# EAGLE board Electronic Design OpenBook Hardware v1 (EAGLE 9.7.0)
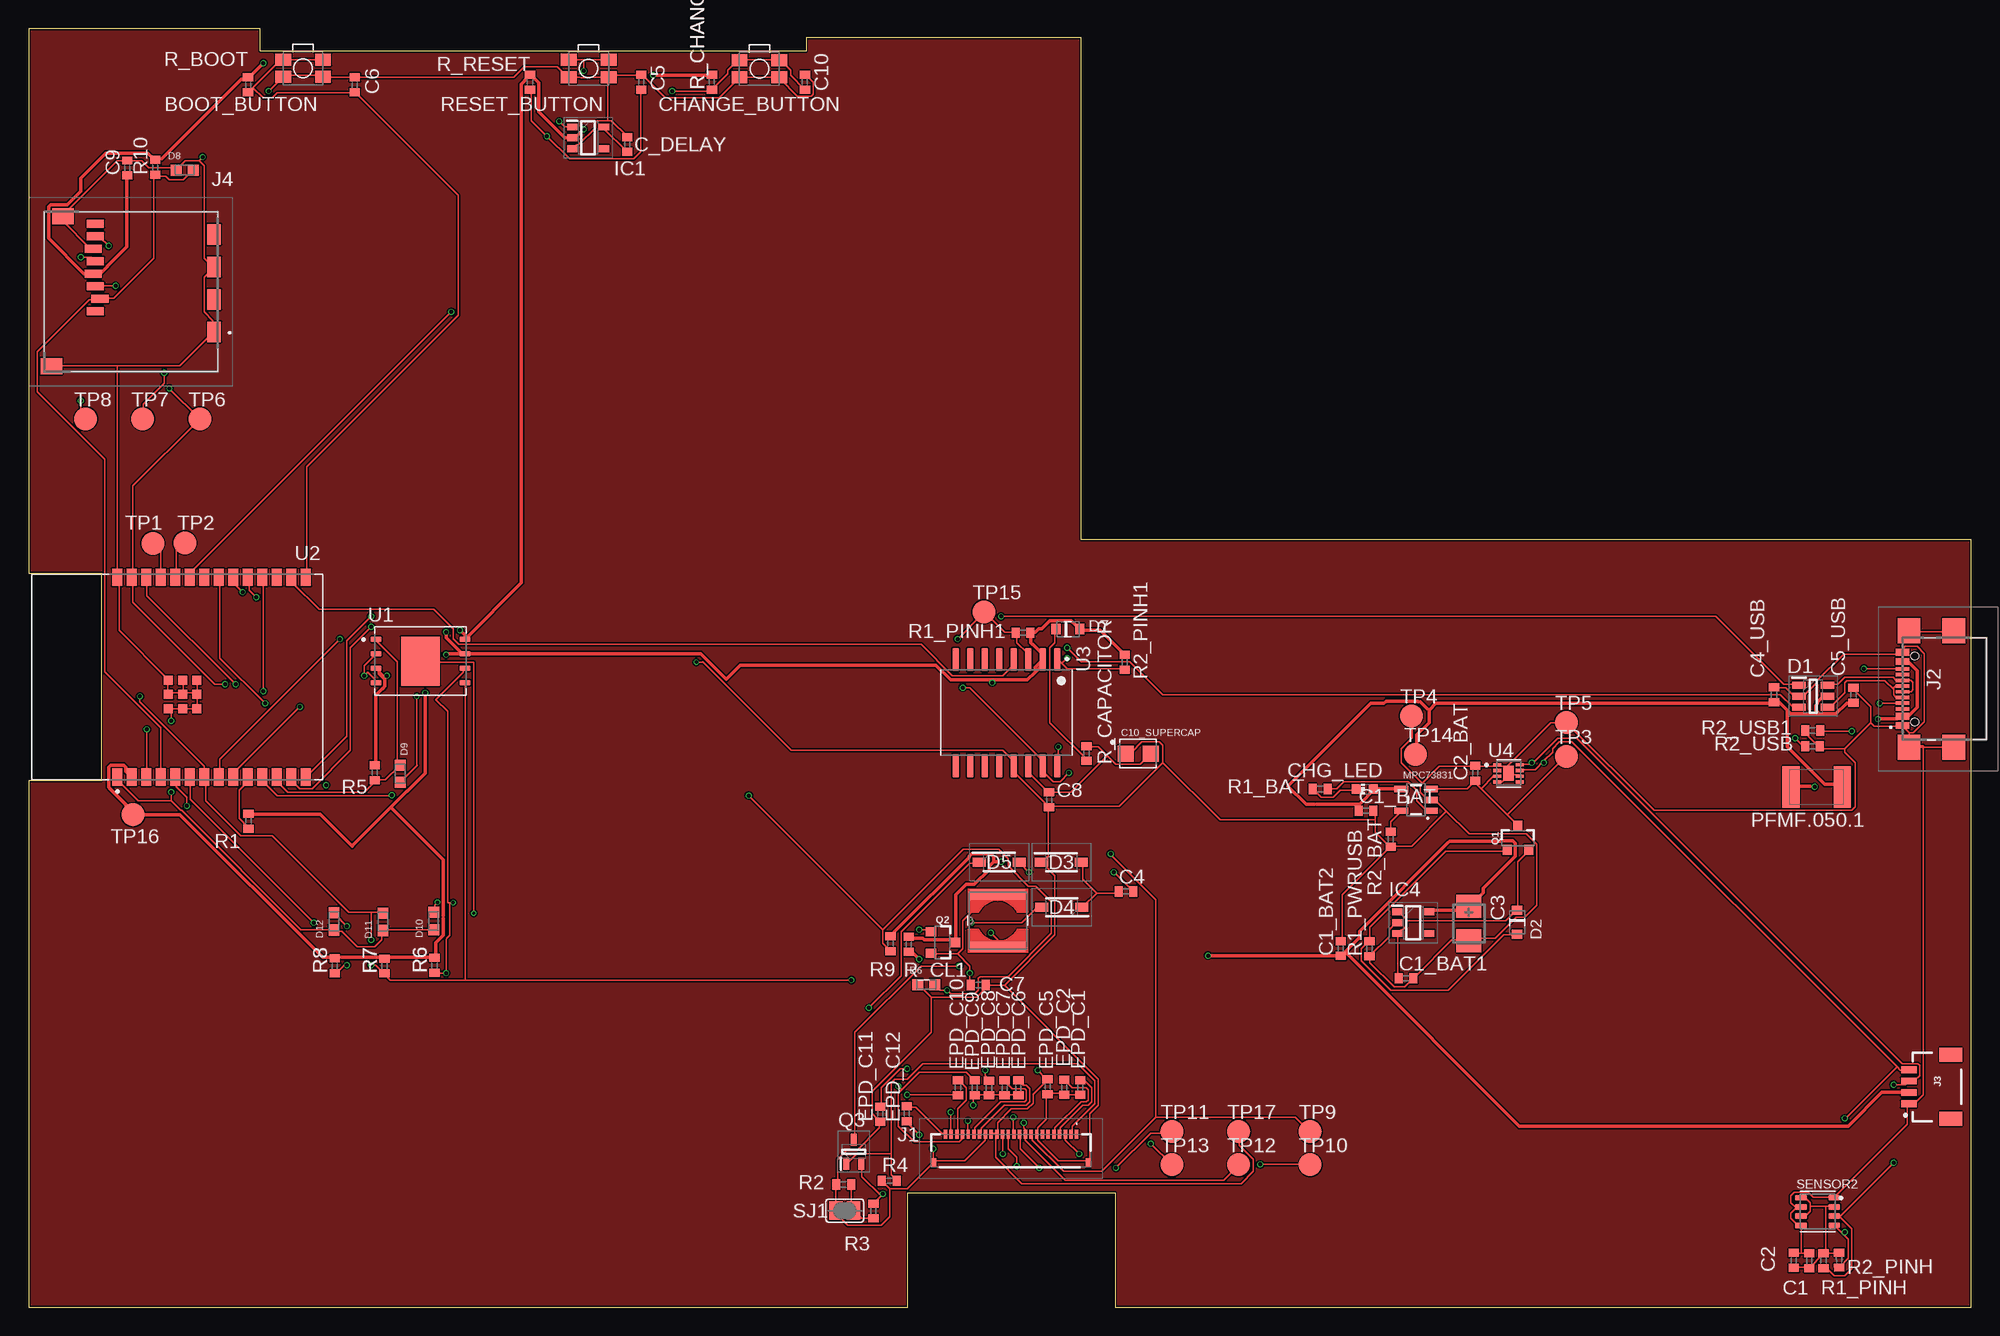
[diagram p0: board, top side]
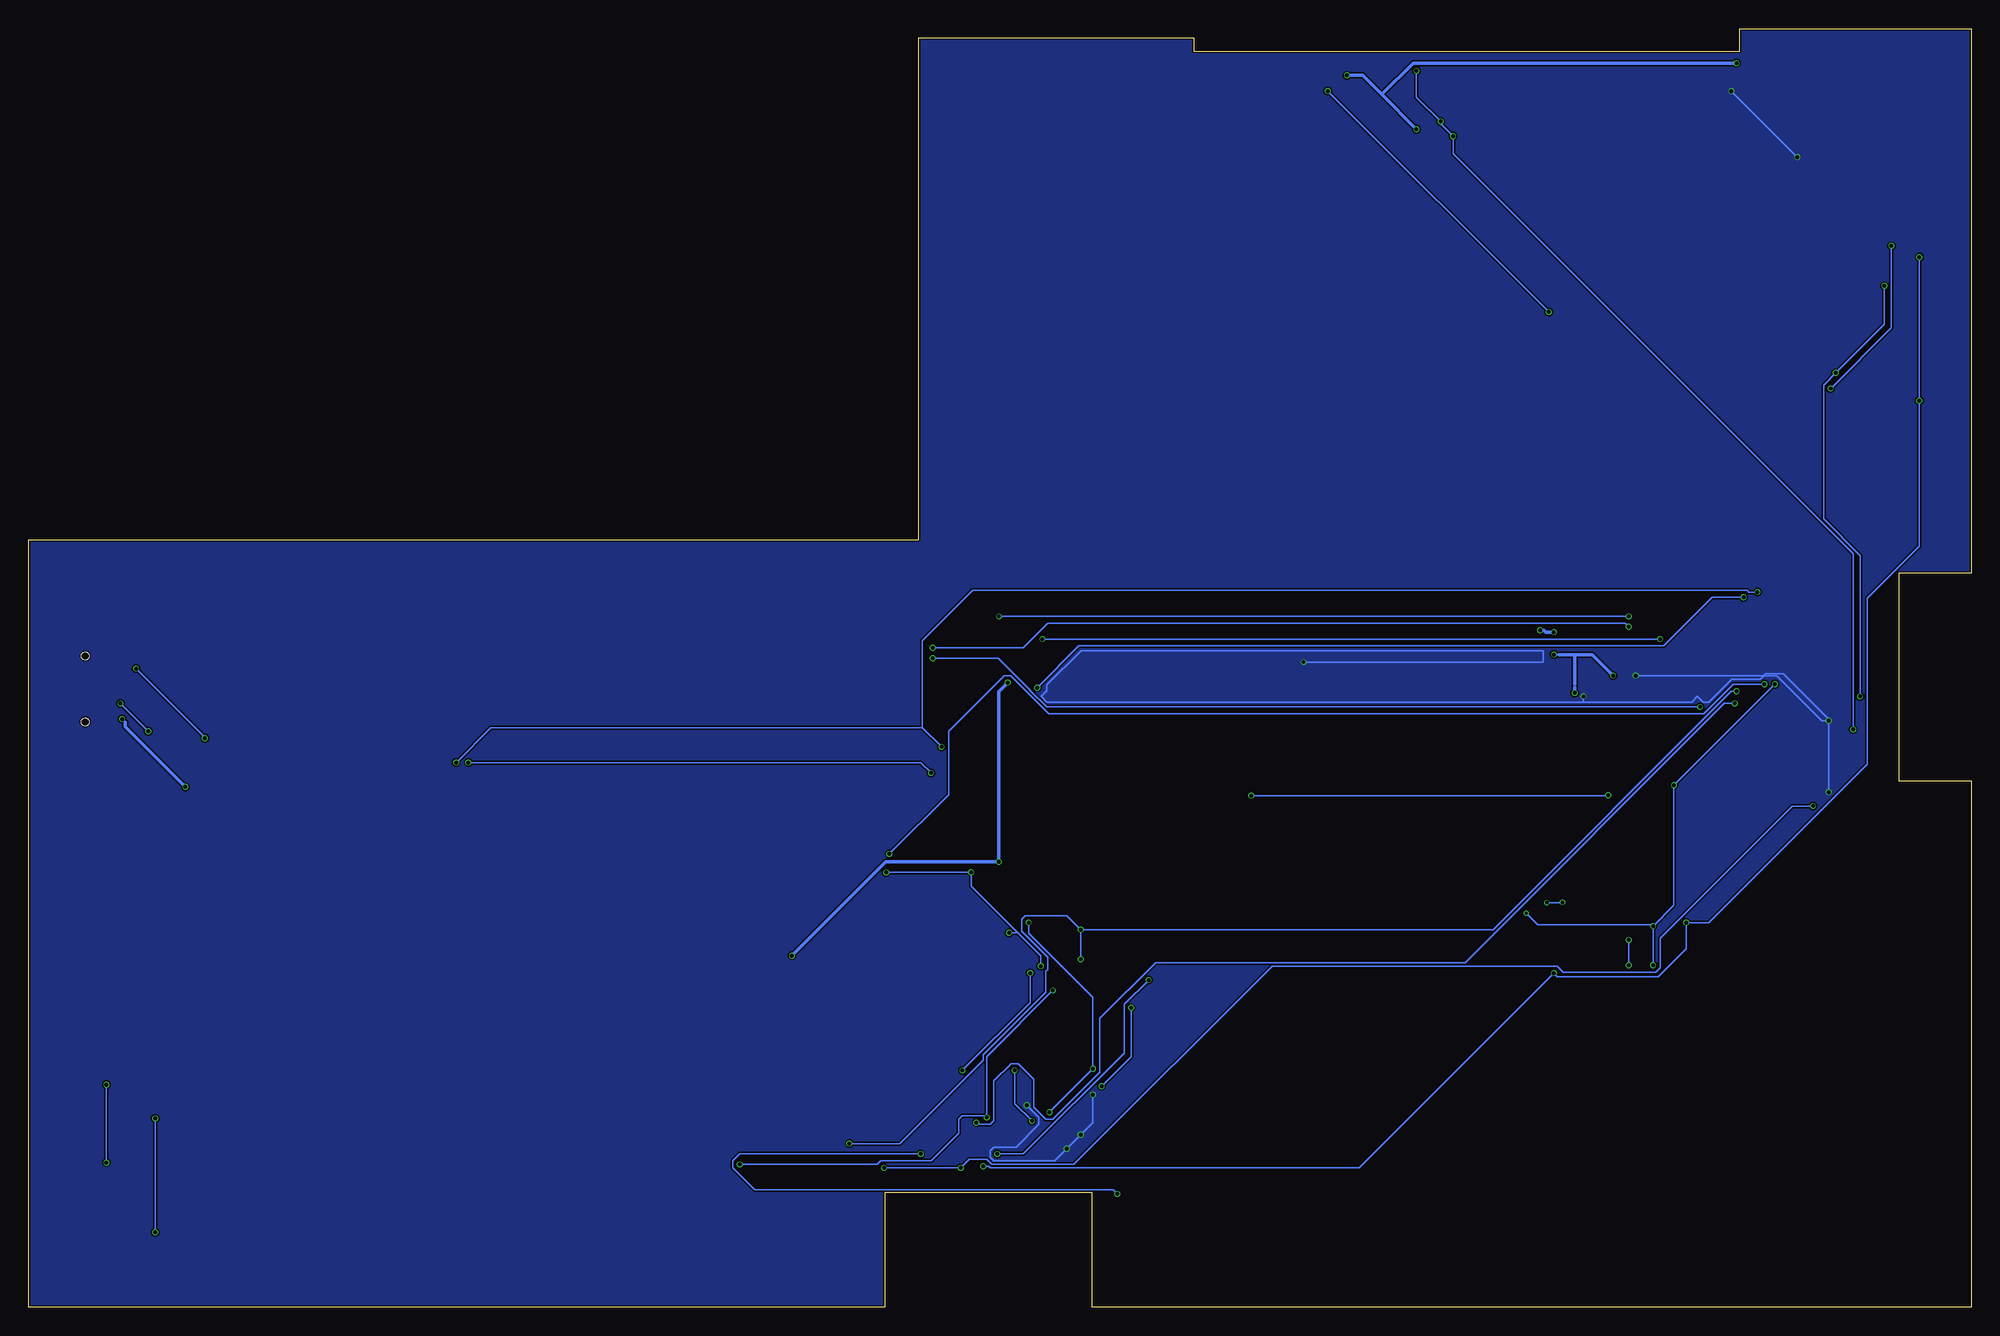
[diagram p1: board, bottom side, seen from below]

Size 170.2 x 112 mm. Coordinates in mm from the lower left corner, seen from the top.
Outline: 0,0 77,0 77,10 95.2,10 95.2,0 170.2,0 170.2,67.2 92.2,67.2 92.2,111.2 68.14,111.2 68.14,110.03 20.28,110.03 20.28,112 0,112 0,64.3 6.39,64.3 6.39,46.1 0,46.1 0,0
Copper layers (1*16): Top 0.035mm / dielectric 1.6mm / Bottom 0.035mm
Design rules "jlcpcb-2layers.dru": minimum track width 0.15mm, minimum drill 0.3mm, track to track 5mil, track to pad 5mil, pad to pad 5mil, via to via 5mil, smd to smd 5mil, copper to edge 0.15mm, drill to drill 6mil, minimum pad ring 10mil, minimum via ring 3mil, stop-mask expansion 4mil, vias tented up to drill 0mil, thermal gap 10mil

## Footprints (pad centres in the part's own frame; a part is rotated, then mirrored left to right if it is on the bottom)
MYBUTTON = smd 1.4 x 1.05: 1 1.75,0.75; 2 -1.75,0.75; 3 -1.75,-0.75; 4 1.75,-0.75
EAGLE-LTSPICE_C0402 = smd 0.7 x 0.9: 1 -0.65,0; 2 0.65,0
ESP32_WROVER_EAGLE-LTSPICE_C0402 = smd 0.7 x 0.9: 1 -0.65,0; 2 0.65,0
RCL_CT3528 = smd 2 x 2.2: + -1.5,0; - 1.5,0
CAPCP3225X100N = smd 1.4 x 1.4: 1 -1.1,0; 2 1.1,0
ADAFRUIT_CHIP-LED0603 = smd 0.8 x 0.8: A 0,-0.75; C 0,0.75
SOT95P280X145-6N = smd 1.2 x 0.6: 1 -1.25,0.95; 2 -1.25,0; 3 -1.25,-0.95; 4 1.25,-0.95; 5 1.25,0; 6 1.25,0.95
ESP32_WROVER_AVX---SD0805S020S1R0_AVX_SD0805S020S1R0_0 = smd 0.8 x 0.9: 1 -1.05,0; 2 1.05,0
SOD3716X135N = smd 1.15 x 0.8: 1 -1.75,0; 2 1.75,0
DIOC1608X36N = smd 0.97 x 0.94: 1 -0.75,0; 2 0.75,0
SOT95P280X120-5N = smd 0.9 x 0.6: 1 -1.4,0.95; 2 -1.4,0; 3 -1.4,-0.95; 4 1.4,-0.95; 5 1.4,0.95
FH34SRJ24S05SH99 = smd 0.3 x 0.8: 1 5.75,1.45; 2 5.25,1.45; 3 4.75,1.45; 4 4.25,1.45; 5 3.75,1.45; 6 3.25,1.45; 7 2.75,1.45; 8 2.25,1.45; 9 1.75,1.45; 10 1.25,1.45; 11 0.75,1.45; 12 0.25,1.45; 13 -0.25,1.45; 14 -0.75,1.45; 15 -1.25,1.45; 16 -1.75,1.45; 17 -2.25,1.45; 18 -2.75,1.45; 19 -3.25,1.45; 20 -3.75,1.45; 21 -4.25,1.45; 22 -4.75,1.45; 23 -5.25,1.45; 24 -5.75,1.45 | smd 0.4 x 0.8: MP1 6.75,-1.05; MP2 -6.75,-1.05
SAMACSYS_PARTS_USB4110GFA = smd 0.3 x 1.15: A1 -3.35,3.678; A4 -2.55,3.678; A5 -1.25,3.678; A6 -0.25,3.678; A7 0.25,3.678; A8 1.25,3.678; A9 2.55,3.678; A12 3.35,3.678; B1 3.05,3.678; B4 2.25,3.678; B5 1.75,3.678; B6 0.75,3.678; B7 -0.75,3.678; B8 -1.75,3.678; B9 -2.25,3.678; B12 -3.05,3.678 | smd 2.18 x 2: MP1 -5.11,-0.827; MP2 5.11,-0.827; MP3 -5.11,3.103; MP4 5.11,3.103 | hole 0.65: -2.89,2.603; 2.89,2.603
JST04_1MM_RA = smd 0.6 x 1.35: 1 -1.5,0; 2 -0.5,0; 3 0.5,0; 4 1.5,0 | smd 1.2 x 2: NC1 2.8,-3.675; NC2 -2.8,-3.675
112ATAARR03ATTEND = smd 1.8 x 1.2: G1 10.6,10.4; G2 4.9,10.4; S1 7.75,10.4; S2 2.05,10.4 | smd 1.4 x 1.9: G3 13.6,-3.85; G4 0.45,-2.85 | smd 0.7 x 1.5: P1 8.8,0; P2 7.7,0.4; P3 6.6,0; P4 5.5,-0.2; P5 4.4,0; P6 3.3,-0.2; P7 2.2,0; P8 1.1,0
IND_4828-WE-TPC_WRE = smd 0.889 x 4.826: 1 -2.286,0; 2 2.286,0
ESP32_WROVER_SPARKFUN-IC-POWER_SOT23-5 = smd 0.55 x 1.2: 1 -0.95,-1.3; 2 0,-1.3; 3 0.95,-1.3; 4 0.95,1.3; 5 -0.95,1.3
ESP32C6_VARISTOR_CT/CN1812 = smd 1.5 x 3.6: 1 -2.25,0; 2 2.25,0
ESP32_WROVER_SPARKFUN-DISCRETESEMI_SOT23-3 = smd 0.8 x 0.9: 1 -0.95,-1; 2 0.95,-1; 3 0,1.1
SOT65P210X110-3N = smd 1.05 x 0.5: 1 -1.05,0.65; 2 -1.05,-0.65; 3 1.05,0
ESP32_WROVER_EAGLE-LTSPICE_R0402 = smd 0.7 x 0.9: 1 -0.65,0; 2 0.65,0
ESP32_WROVER_BME680_PSON80P300X300X100-8N = smd 1.016 x 0.5: 1 1.458,1.2; 2 1.458,0.4; 3 1.458,-0.4; 4 1.458,-1.2; 5 -1.458,-1.22; 6 -1.458,-0.4; 7 -1.458,0.4; 8 -1.458,1.2
SJ = smd 1.168 x 1.6: 1 -0.762,0; 2 0.762,0
TP20R = smd 2 x 2: TP 0,0
SON127P600X800X80-9N = smd 0.94 x 0.44: 1 -3.895,1.905; 2 -3.895,0.635; 3 -3.895,-0.635; 4 -3.895,-1.905; 5 3.895,-1.905; 6 3.895,-0.635; 7 3.895,0.635; 8 3.895,1.905 | smd 3.4 x 4.3: 9 0,0
XCVR_ESP32-C6-WROOM-1-N8 = smd 1.5 x 0.9: 1 -8.75,5.26; 2 -8.75,3.99; 3 -8.75,2.72; 4 -8.75,1.45; 5 -8.75,0.18; 6 -8.75,-1.09; 7 -8.75,-2.36; 8 -8.75,-3.63; 9 -8.75,-4.9; 10 -8.75,-6.17; 11 -8.75,-7.44; 12 -8.75,-8.71; 13 -8.75,-9.98; 14 -8.75,-11.25; 15 8.75,-11.25; 16 8.75,-9.98; 17 8.75,-8.71; 18 8.75,-7.44; 19 8.75,-6.17; 20 8.75,-4.9; 21 8.75,-3.63; 22 8.75,-2.36; 23 8.75,-1.09; 24 8.75,0.18; 25 8.75,1.45; 26 8.75,2.72; 27 8.75,3.99; 28 8.75,5.26 | smd 0.8 x 0.8: 29_1 -2.755,0.79; 29_2 -1.505,0.79; 29_3 -0.255,0.79; 29_4 -2.755,-0.46; 29_5 -1.505,-0.46; 29_6 -0.255,-0.46; 29_7 -2.755,-1.71; 29_8 -1.505,-1.71; 29_9 -0.255,-1.71
SOIC127P1032X265-16N = smd 2.05 x 0.59: 1 -4.655,4.445; 2 -4.655,3.175; 3 -4.655,1.905; 4 -4.655,0.635; 5 -4.655,-0.635; 6 -4.655,-1.905; 7 -4.655,-3.175; 8 -4.655,-4.445; 9 4.655,-4.445; 10 4.655,-3.175; 11 4.655,-1.905; 12 4.655,-0.635; 13 4.655,0.635; 14 4.655,1.905; 15 4.655,3.175; 16 4.655,4.445
SON50P200X200X80-9N = smd 0.76 x 0.27: 1 -0.985,0.75; 2 -0.985,0.25; 3 -0.985,-0.25; 4 -0.985,-0.75; 5 0.985,-0.75; 6 0.985,-0.25; 7 0.985,0.25; 8 0.985,0.75 | smd 0.9 x 1.3: 9 0,0

## Placement (x,y rotation side)
BOOT_BUTTON  BUTTON_CUSYOMV1MYBUTTONV1  [MYBUTTON]  24.04,108.53 180 top
C1  100nF  [EAGLE-LTSPICE_C0402]  155.99,4.06 90 top
C1_BAT  4.7uF  [ESP32_WROVER_EAGLE-LTSPICE_C0402]  117.16,43.47 0 top
C1_BAT1  4.7uF  [ESP32_WROVER_EAGLE-LTSPICE_C0402]  120.67,28.81 0 top
C1_BAT2  4.7uF  [ESP32_WROVER_EAGLE-LTSPICE_C0402]  114.94,31.41 90 top
C2  100nF  [EAGLE-LTSPICE_C0402]  154.63,4.09 90 top
C2_BAT  4.7uF  [ESP32_WROVER_EAGLE-LTSPICE_C0402]  126.73,46.77 90 top
C3  100uF TANT  [RCL_CT3528]  126.17,33.6 270 top
C4  4.7uF/25V  [ESP32_WROVER_EAGLE-LTSPICE_C0402]  96.14,36.41 0 top
C4_USB  100nF  [ESP32_WROVER_EAGLE-LTSPICE_C0402]  152.9,53.64 90 top
C5  1uF  [EAGLE-LTSPICE_C0402]  53.68,107.3 90 top
C5_USB  4.7uF  [ESP32_WROVER_EAGLE-LTSPICE_C0402]  159.87,53.61 90 top
C6  100nF  [EAGLE-LTSPICE_C0402]  28.57,107.07 90 top
C7  10uF  [ESP32_WROVER_EAGLE-LTSPICE_C0402]  83.2,28.21 0 top
C8  100nF  [EAGLE-LTSPICE_C0402]  89.4,44.43 270 top
C9  100nF  [ESP32_WROVER_EAGLE-LTSPICE_C0402]  8.65,99.79 90 top
C10  100nF  [EAGLE-LTSPICE_C0402]  68.01,107.3 90 top
C10_SUPERCAP  CPH3225ACAPCP322V1  [CAPCP3225X100N]  97.2,48.48 0 top
C_DELAY  100nF  [EAGLE-LTSPICE_C0402]  52.44,101.84 90 top
CHANGE_BUTTON  BUTTON_CUSYOMV1MYBUTTONV1  [MYBUTTON]  64.03,108.47 180 top
CHG_LED  [ADAFRUIT_CHIP-LED0603]  117.06,45.38 90 top
D1  USBLC6-2SC6YSOT95P2801X1V2  [SOT95P280X145-6N]  156.33,53.51 0 top
D2  ESP32_WROVER_AVX---SD0805S020S1R0_AVX_SD0805S020S1R0_0_0  [ESP32_WROVER_AVX---SD0805S020S1R0_AVX_SD0805S020S1R0_0]  130.4,33.72 270 top
D3  MBR0530SOD3716XV1  [SOD3716X135N]  90.48,38.96 0 top
D4  MBR0530SOD3716XV1  [SOD3716X135N]  90.51,35.03 180 top
D5  MBR0530SOD3716XV1  [SOD3716X135N]  85.03,38.98 0 top
D6  PGB1010603MRDIOC1608XV1  [DIOC1608X36N]  78.64,28.24 0 top
D7  ESP32_WROVER_AVX---SD0805S020S1R0_AVX_SD0805S020S1R0_0_0  [ESP32_WROVER_AVX---SD0805S020S1R0_AVX_SD0805S020S1R0_0]  91.05,59.39 0 top
D8  PGB1010603MRDIOC1608XV1  [DIOC1608X36N]  13.68,99.59 0 top
D9  PGB1010603MRDIOC1608XV1  [DIOC1608X36N]  32.56,46.72 90 top
D10  PGB1010603MRDIOC1608XV1  [DIOC1608X36N]  35.49,33.82 90 top
D11  PGB1010603MRDIOC1608XV1  [DIOC1608X36N]  31.04,33.74 90 top
D12  PGB1010603MRDIOC1608XV1  [DIOC1608X36N]  26.75,33.78 90 top
EPD_C1  1uF/50V  [EAGLE-LTSPICE_C0402]  92.12,19.24 90 top
EPD_C2  1uF/50V  [EAGLE-LTSPICE_C0402]  90.72,19.25 90 top
EPD_C5  0.1uF/50V  [EAGLE-LTSPICE_C0402]  89.27,19.31 90 top
EPD_C6  1uF/50V  [EAGLE-LTSPICE_C0402]  86.71,19.2 90 top
EPD_C7  1uF/50V  [EAGLE-LTSPICE_C0402]  85.5,19.2 90 top
EPD_C8  1uF/50V  [EAGLE-LTSPICE_C0402]  84.14,19.19 90 top
EPD_C9  1uF/50V  [EAGLE-LTSPICE_C0402]  82.88,19.21 90 top
EPD_C10  1uF/50V  [EAGLE-LTSPICE_C0402]  81.42,19.22 90 top
EPD_C11  1uF/50V  [EAGLE-LTSPICE_C0402]  74.61,16.9 90 top
EPD_C12  1uF/50V  [EAGLE-LTSPICE_C0402]  76.93,16.95 90 top
IC1  BD5229G-TR  [SOT95P280X120-5N]  49.02,102.43 0 top
IC4  XC6220A331MR-GSOT95P285V1  [SOT95P280X120-5N]  121.3,33.67 0 top
J1  FH34SRJ-24S-0.5SH_99_FH34V1  [FH34SRJ24S05SH99]  86.07,13.7 0 top
J2  SAMACSYS_PARTS_USB4110-GF-ASAMACSYSV1  [SAMACSYS_PARTS_USB4110GFA]  167.83,54.15 90 top
J3  QWIIC_RIGHT_ANGLE  [JST04_1MM_RA]  164.72,19.3 90 top
J4  112A-TAAR-R03_ATTEND1123ATAARV1  [112ATAARR03ATTEND]  5.86,96.02 270 top
L1  744043680IND_4828-WE-TPC_WRE  [IND_4828-WE-TPC_WRE]  84.92,33.85 90 top
MPC73831  ESP32_WROVER_SPARKFUN-IC-POWER_MCP73831ESP32_WROOMMCP673811  [ESP32_WROVER_SPARKFUN-IC-POWER_SOT23-5]  121.55,44.43 90 top
PFMF.050.1  ESP32C6_VARISTOR  [ESP32C6_VARISTOR_CT/CN1812]  156.64,45.56 0 top
Q1  20V/4.2A/52mΩ/1.4W  [ESP32_WROVER_SPARKFUN-DISCRETESEMI_SOT23-3]  130.47,41.06 0 top
Q2  20V/4.2A/52mΩ/1.4W  [ESP32_WROVER_SPARKFUN-DISCRETESEMI_SOT23-3]  80.05,31.94 270 top
Q3  SI1308EDL-T1-GE3SOT65P21V1  [SOT65P210X110-3N]  72.29,13.62 90 top
R1  10K  [ESP32_WROVER_EAGLE-LTSPICE_R0402]  19.27,42.57 90 top
R1_BAT  200  [ESP32_WROVER_EAGLE-LTSPICE_R0402]  113.14,45.38 0 top
R1_PINH  10K  [ESP32_WROVER_EAGLE-LTSPICE_R0402]  157.24,4.07 90 top
R1_PINH1  10K  [ESP32_WROVER_EAGLE-LTSPICE_R0402]  87.12,59.08 0 top
R1_PWRUSB  100K  [ESP32_WROVER_EAGLE-LTSPICE_R0402]  117.47,31.39 90 top
R2  2.2  [ESP32_WROVER_EAGLE-LTSPICE_R0402]  71.4,10.74 0 top
R2_BAT  2K  [ESP32_WROVER_EAGLE-LTSPICE_R0402]  119.32,40.98 90 top
R2_PINH  10K  [ESP32_WROVER_EAGLE-LTSPICE_R0402]  158.6,4.12 90.5 top
R2_PINH1  10K  [ESP32_WROVER_EAGLE-LTSPICE_R0402]  96.02,56.49 90 top
R2_USB  5k1  [ESP32_WROVER_EAGLE-LTSPICE_R0402]  156.28,49.12 0 top
R2_USB1  5k1  [ESP32_WROVER_EAGLE-LTSPICE_R0402]  156.29,50.51 0 top
R3  0.47  [ESP32_WROVER_EAGLE-LTSPICE_R0402]  74.01,8.42 90 top
R4  10K  [ESP32_WROVER_EAGLE-LTSPICE_R0402]  75.41,11.07 0 top
R5  10K  [ESP32_WROVER_EAGLE-LTSPICE_R0402]  30.33,46.82 90 top
R6  10K  [ESP32_WROVER_EAGLE-LTSPICE_R0402]  35.56,29.93 90 top
R7  10K  [ESP32_WROVER_EAGLE-LTSPICE_R0402]  31.18,29.88 90 top
R8  10K  [ESP32_WROVER_EAGLE-LTSPICE_R0402]  26.83,29.89 90 top
R9  10K  [ESP32_WROVER_EAGLE-LTSPICE_R0402]  75.51,31.84 90 top
R10  10K  [ESP32_WROVER_EAGLE-LTSPICE_R0402]  11.09,99.84 90 top
R_BOOT  10K  [ESP32_WROVER_EAGLE-LTSPICE_R0402]  19.23,107.07 90 top
R_CAPACITOR  15  [ESP32_WROVER_EAGLE-LTSPICE_R0402]  92.68,48.49 90 top
R_CHANGE  10K  [ESP32_WROVER_EAGLE-LTSPICE_R0402]  59.86,107.3 90 top
R_CL1  10K  [ESP32_WROVER_EAGLE-LTSPICE_R0402]  77.11,31.77 90 top
R_RESET  10K  [ESP32_WROVER_EAGLE-LTSPICE_R0402]  43.93,107.3 90 top
RESET_BUTTON  BUTTON_CUSYOMV1MYBUTTONV1  [MYBUTTON]  49.06,108.5 180 top
SENSOR2  ESP32_WROVER_BME680_BME680ESP32_WROOM_BME680V1  [ESP32_WROVER_BME680_PSON80P300X300X100-8N]  156.72,8.37 0 top
SJ1  [SJ]  71.5,8.45 0 top
TP1  TPTP20R  [TP20R]  10.9,66.9 0 top
TP2  TPTP20R  [TP20R]  13.69,66.94 0 top
TP3  TPTP20R  [TP20R]  134.71,48.24 0 top
TP4  TPTP20R  [TP20R]  121.14,51.79 0 top
TP5  TPTP20R  [TP20R]  134.71,51.22 0 top
TP6  TPTP20R  [TP20R]  15,77.8 0 top
TP7  TPTP20R  [TP20R]  10,77.8 0 top
TP8  TPTP20R  [TP20R]  5,77.8 0 top
TP9  TPTP20R  [TP20R]  112.27,15.38 0 top
TP10  TPTP20R  [TP20R]  112.26,12.47 0 top
TP11  TPTP20R  [TP20R]  100.16,15.38 0 top
TP12  TPTP20R  [TP20R]  106,12.47 0 top
TP13  TPTP20R  [TP20R]  100.16,12.47 0 top
TP14  TPTP20R  [TP20R]  121.49,48.41 0 top
TP15  TPTP20R  [TP20R]  83.69,60.9 0 top
TP16  TPTP20R  [TP20R]  9.15,43.14 0 top
TP17  TPTP20R  [TP20R]  106,15.38 0 top
U1  W25Q512JVEIQSON127P6V1  [SON127P600X800X80-9N]  34.34,56.59 0 top
U2  ESP32-C6-WROOM-1-N8XCVR_ESPV1  [XCVR_ESP32-C6-WROOM-1-N8]  13.04,55.18 90 top
U3  DS3231SN#SOIC127P1V1  [SOIC127P1032X265-16N]  85.67,52.07 270 top
U4  MAX17048G+T10SON50P20V1  [SON50P200X200X80-9N]  129.65,46.75 0 top

## Library data of the parts
BOOT_BUTTON C1_BAT C1_BAT1 C1_BAT2 C2_BAT C3 C4 C4_USB C5_USB C7 C9 C10_SUPERCAP CHANGE_BUTTON CHG_LED D1-D12 IC1 IC4 J1-J4 L1 MPC73831 PFMF.050.1 Q1-Q3 R1 R1_BAT R1_PINH R1_PINH1 R1_PWRUSB R2 R2_BAT R2_PINH R2_PINH1 R2_USB R2_USB1 R3-R10 R_BOOT R_CAPACITOR R_CHANGE R_CL1 R_RESET RESET_BUTTON SENSOR2 SJ1 TP1-TP17 U1-U4 = DeskAssistant v19 v1
C1 C2 C5 C6 C8 C10 C_DELAY EPD_C1 EPD_C2 EPD_C5-EPD_C12 = DeskAssistant v19 v1; SPICEMODEL: NONE; SPICEPREFIX: C

## Nets
3V3: C1_BAT2.1 C3.+ C9.1 D7.2 IC1.2 IC4.5 J3.2 J4.P4 Q2.3 R1.2 R1_PINH1.2 R2_PINH1.2 R5.2 R6.2 R7.2 R8.2 R9.2 R10.2 R_BOOT.2 R_CHANGE.2 R_CL1.2 R_RESET.2 TP16.TP U1.3 U1.7 U1.8 U2.2 U3.2
12C_PW: C1.1 C2.1 R1_PINH.2 R2_PINH.2 SENSOR2.2 SENSOR2.6 SENSOR2.8
32KHZ: R2_PINH1.1 U2.9 U3.1
DN: D1.4 J2.A7 J2.B7
DP: D1.6 J2.A6 J2.B6
EPD_3V3: C7.1 EPD_C5.2 J1.15 J1.16 L1.2 Q2.2 TP17.TP
EPD_3V3_C: Q2.1 R_CL1.1 TP13.TP U2.18
EPD_BUSY: J1.9 TP9.TP U2.26
EPD_CS: D6.2 J1.12 R9.1 TP10.TP U2.11
EPD_DC: J1.11 TP11.TP U2.5
EPD_RST: J1.10 TP12.TP U2.21
FLASH_CS: D9.2 R5.1 U1.1 U2.12
GDR: J1.2 Q3.1 R4.2
GND: BOOT_BUTTON.1 BOOT_BUTTON.2 C1.2 C1_BAT1.2 C1_BAT2.2 C1_BAT.2 C2.2 C2_BAT.2 C3.- C4_USB.2 C5.2 C5_USB.2 C6.2 C7.2 C8.2 C9.2 C10.2 C10_SUPERCAP.1 C_DELAY.2 CHANGE_BUTTON.1 CHANGE_BUTTON.2 D1.2 D3.1 D6.1 D8.1 D9.1 D10.1 D11.1 D12.1 EPD_C1.1 EPD_C2.1 EPD_C5.1 EPD_C6.1 EPD_C7.1 EPD_C8.1 EPD_C9.1 EPD_C10.1 EPD_C11.1 EPD_C12.1 IC1.3 IC4.2 J1.8 J1.17 J1.MP1 J1.MP2 J2.A1 J2.A12 J2.B1 J2.B12 J2.MP1 J2.MP2 J2.MP3 J2.MP4 J3.1 J4.G1 J4.G2 J4.G3 J4.G4 J4.P6 MPC73831.2 R1_PWRUSB.1 R2.1 R2_BAT.1 R2_USB1.1 R2_USB.2 R4.1 RESET_BUTTON.1 RESET_BUTTON.2 SENSOR2.1 SENSOR2.5 SENSOR2.7 SJ1.1 TP4.TP TP5.TP U1.2 U1.4 U2.1 U2.28 U2.29_1 U2.29_2 U2.29_3 U2.29_4 U2.29_5 U2.29_6 U2.29_7 U2.29_8 U2.29_9 U3.13 U4.1 U4.4 U4.6 U4.9
GPIO8: R1.1 U2.10
I2C_PW: U2.17
INT_RTC: R1_PINH1.1 TP15.TP U2.8 U3.3
IO/BOOT: BOOT_BUTTON.3 BOOT_BUTTON.4 C6.1 R_BOOT.1 U2.15
IO/CHANGE: C10.1 CHANGE_BUTTON.3 CHANGE_BUTTON.4 R_CHANGE.1 U2.23
MISO: D12.2 J4.P7 R8.1 TP6.TP U1.9 U2.27
MOSI: D11.2 J1.14 J4.P3 R7.1 TP7.TP U1.5 U2.7
N$1: J2.A5 R2_USB1.2
N$2: C4.1 D3.2 D4.1
N$3: C_DELAY.1 IC1.5
N$4: CHG_LED.C R1_BAT.1
N$5: MPC73831.1 R1_BAT.2
N$7: J2.B5 R2_USB.1
N$8: MPC73831.5 R2_BAT.2
N$14: EPD_C2.2 J1.5
N$24: EPD_C1.2 J1.4
N$25: EPD_C12.2 J1.24
N$27: EPD_C10.2 J1.22
N$29: EPD_C8.2 J1.20
N$30: EPD_C7.2 J1.19
N$31: EPD_C6.2 J1.18
N$39: D7.1 R_CAPACITOR.1
N$42: D2.2 Q1.1 R1_PWRUSB.2
N$43: C1_BAT1.1 D2.1 IC4.1 IC4.3 Q1.2
PREVGH: D5.1 EPD_C9.2 J1.21
PREVGL: D4.2 EPD_C11.2 J1.23
RESE: J1.3 Q3.2 R3.2
RESE': R2.2 R3.1 SJ1.2
RESET: C5.1 IC1.1 R_RESET.1 RESET_BUTTON.3 RESET_BUTTON.4 U2.3
RTC_RST: U2.16 U3.4
RX: TP2.TP U2.24
SCK: D10.2 J1.13 J4.P5 R6.1 TP8.TP U1.6 U2.6
SCL: J3.4 R2_PINH.1 SENSOR2.4 U2.20 U3.16 U4.7
SDA: J3.3 R1_PINH.1 SENSOR2.3 U2.19 U3.15 U4.8
SRC: C4.2 D5.2 L1.1 Q3.3
SS_SD: D8.2 J4.P2 R10.1 U2.4
TX: TP1.TP U2.25
USB_D+: D1.1 U2.14
USB_D-: D1.3 U2.13
VBAT: C2_BAT.1 MPC73831.3 Q1.3 TP3.TP U4.2 U4.3
VBUS: C1_BAT.1 C4_USB.1 C5_USB.1 CHG_LED.A D1.5 MPC73831.4 PFMF.050.1.2 TP14.TP
VRTC: C8.1 C10_SUPERCAP.2 R_CAPACITOR.2 U3.14
VUSB: J2.A4 J2.A9 J2.B4 J2.B9 PFMF.050.1.1

## Tracks (layer width: path | path; a pad name or v marks a point on that pad's centre or on a via)
3V3  (via drill 0.35)
  Top 0.152: 124.49,40.82 124.32,40.66 | 129.04,40.84 128.95,40.84 | 127.41,36.28 127.29,36.15 | 126.31,35.18 126.28,35.14 C3.+ | C1_BAT2.1 115.06,30.79 115.37,31.09 115.43,31.03 | 123.22,34.75 122.83,34.75 IC4.5 | 159.41,15.85 159.47,15.91 | 115.13,30.9 C1_BAT2.1 | U2.2 8.99,46.48 8.99,46.79 8.23,47.55 7.32,47.55 7.01,47.24 7.01,45.41 8.52,43.9 9.14,43.28 TP16.TP 9.3,43.13 10.24,43.13 | 31.67,30.63 31.24,30.63 R7.2 31.09,30.63 27.39,30.63 26.98,30.63 R8.2 26.82,30.63 26.72,30.63 | 8.6,99.11 C9.1 | 5.79,90.53 J4.P4 5.64,90.53 4.85,90.53 | 11.69,100.58 11.12,100.58 R10.2 10.97,100.58 | 19.15,107.55 19.2,107.59 R_BOOT.2 19.36,107.75 19.71,108.11 | 44.05,107.89 44.04,107.9 R_RESET.2 43.89,107.9 43.46,107.47 | 48.27,102.83 v48.62,103.17 | 77.63,32.31 77.11,32.31 R_CL1.2 | 75.85,32.87 75.59,32.61 R9.2 | 81.23,32.37 81.23,32 Q2.3 | 88.35,57.65 87.78,58.22 87.78,58.98 R1_PINH1.2 87.78,59.13 88.2,59.13 | 88.7,57.09 88.7,56.84 U3.2 88.7,56.69 88.7,56.24 | 92.58,59.28 92.2,59.28 D7.2 92.06,59.43 | 30.48,53.65 31.24,54.41 31.24,55.17 | 31.24,55.17 30.73,55.68 30.48,55.93 U1.3 | 30.4,47.51 R5.2 | 31.24,55.17 v31.39,55.32 | 28.35,40.39 28.5,40.54 | 114.44,30.79 114.91,30.79 C1_BAT2.1 | R6.2 35.66,30.63 35.66,31.01 | 36.32,34.28 36.32,34.04
  Top 0.3: 8.6,99.11 8.6,92.88 6.91,91.19 6.91,91.14 6.29,90.53 5.79,90.53 | 4.85,90.53 1.75,93.62 1.75,96.39 1.93,96.57 3.38,96.57 4.57,97.76 4.57,98.9 6.76,101.09 10.46,101.09 10.97,100.58 | 11.69,100.58 18.65,107.55 19.15,107.55 | v20.57,108.97 19.71,108.11 19.2,107.59 | 48.27,102.83 47.87,102.43 IC1.2 46.97,102.43 44.68,104.71 44.68,107.26 44.05,107.89 | 43.46,107.47 43.46,107.41 43.18,107.12 43.18,63.44 U1.8 38.23,58.84 v37.8,59.28 | v36.58,59.13 36.58,58.64 38.06,57.15 38.31,57.15 | U1.7 38.31,57.15 | U1.7 58.9,57.23 61.11,55.02 62.33,56.24 79.47,56.24 80.77,54.94 84.65,54.94 | 38.31,57.15 38.57,57.15 38.49,57.23 U1.7 | 88.7,56.24 88.7,56.14 88.17,55.62 | 87.78,59.13 87.78,58.22 87.95,58.05 88.17,57.83 88.35,57.65 88.7,57.3 88.7,57.09 | 88.2,59.13 88.5,59.43 88.76,59.43 89.47,60.14 91.34,60.14 92.06,59.43 | 92.58,59.28 93.88,59.28 R2_PINH1.2 | v54.71,107.9 59.81,107.9 R_CHANGE.2 | U2.2 8.53,46.95 8.53,47.3 8.35,47.48 7.2,47.48 7.02,47.3 7.02,45.55 8.52,44.06 8.52,43.9 TP16.TP | 10.24,43.13 13.26,43.13 25.76,30.63 26.72,30.63 | 27.39,30.63 31.24,30.63 | 31.67,30.63 35.51,30.63 R6.2 | 28.5,40.54 31.74,43.78 | 31.74,43.78 33.14,45.18 33.16,45.18 34.75,46.77 v34.75,53.8 | 30.73,55.68 30.73,55.48 31.22,55 31.22,54.37 31.01,54.16 31,54.16 30.48,53.65 30.4,53.56 30.4,47.51 | 127.41,36.28 127.41,36.67 130.22,39.48 130.22,40.63 130.01,40.84 129.04,40.84 | 128.95,40.84 128.93,40.82 124.49,40.82 | 124.32,40.66 116.59,32.93 116.59,32.32 116.54,32.32 115.13,30.9 | 115.43,31.03 130.61,15.85 159.41,15.85 | 159.47,15.91 162.36,18.8 J3.2 | v84.42,54.71 84.65,54.94 | U3.2 88.17,56.05 88.17,55.62
  Top 0.3: 88.17,55.62 87.5,54.94 84.65,54.94 | 114.44,30.79 v103.33,30.79 | R1.2 19.35,43.17 25.56,43.17 28.35,40.39 | 77.63,32.31 78.35,32.31 78.47,32.19 80.9,32.19 Q2.3 | 81.23,32.37 81.23,36.12 82.13,37.02 82.86,37.02 84.16,38.33 84.16,38.63 84.54,39.01 | 75.85,32.87 82.4,39.43 82.4,39.51 82.63,39.73 84.26,39.73 84.54,39.45 84.54,39.01 | 84.54,39.01 v85.21,39.01 | v36.58,57.16 36.6,57.16 36.66,57.23 U1.7 | 127.29,36.15 126.31,35.18 125.88,34.75 123.22,34.75 | 35.66,31.01 35.66,31.89 36.32,32.56 36.32,34.04 | 36.32,34.28 36.32,39.2 31.74,43.78
  Bottom 0.152: 33.22,57.15 34.75,57.15 36.15,57.15 36.16,57.16 v36.58,57.16 | 34.75,54.54 34.75,54.31
  Bottom 0.3: v20.57,108.97 48.92,108.97 51.66,106.22 | 51.66,106.22 v48.62,103.17 | 51.66,106.22 53.34,107.9 v54.71,107.9 | v36.58,59.13 37.31,59.13 37.46,59.28 v37.8,59.28 | 34.75,54.31 v34.75,53.8 | 34.75,57.15 34.75,54.54 | 36.15,57.15 33.22,57.15 v31.39,55.32 | v84.42,54.71 85.21,53.92 v85.21,39.01 95.1,39.01 v103.33,30.79
12C_PW
  Top 0.152: 156.06,8.84 156.06,9.14 155.75,9.45 155.3,9.45 SENSOR2.8 | 156.06,8.84 156.06,8.38 155.75,8.08 155.3,8.08 SENSOR2.6 | 156.06,8.84 157.43,8.84 | 157.43,8.84 158.04,8.84 SENSOR2.2 | C2.1 154.69,3.5 155.91,3.5 C1.1 156.06,3.5 157.12,4.57 R1_PINH.2 | 157.43,4.72 158.5,4.72 R2_PINH.2 | 157.43,4.72 157.28,4.72 R1_PINH.2 | 157.43,4.72 157.43,8.84 | 157.43,4.72 R1_PINH.2
32KHZ  (via drill 0.35)
  Top 0.152: 90.53,56.39 90.22,56.69 U3.1 | 90.53,56.39 90.98,55.93 96.01,55.93 R2_PINH1.1 | v23.77,52.58 17.98,46.79 17.98,46.48 U2.9 | 90.53,56.39 v90.98,56.84
  Bottom 0.152: v23.77,52.58 81.01,52.58 82.45,54.01 82.45,54.03 85.26,56.84 v90.98,56.84
A
  pour Top: 76.96,10.06 76.98,10.08 95.22,10.08 95.24,10.06 95.26,10.04 95.28,10.02 95.28,0.07 170.12,0.07 170.12,67.12 92.18,67.12 92.16,67.14 92.14,67.16 92.12,67.18 92.12,111.12 68.22,111.12 68.22,110.01 68.2,109.99 68.18,109.97 68.16,109.95 20.26,109.95 20.24,109.97 20.22,109.99 20.2,110.01 20.2,111.92 0.08,111.92 0.08,64.38 6.41,64.38 6.43,64.36 6.45,64.34 6.47,64.32 6.47,46.08 6.45,46.06 6.43,46.04 6.41,46.02 0.08,46.02 0.08,0.08 76.92,0.08 76.92,10.02 76.94,10.04
DN
  Top 0.152: 163.37,54.1 162.61,54.86 159.26,54.86 159.11,54.71 159.11,53.8 157.89,52.58 157.58,52.58 D1.4 | J2.B7 164.14,53.41 163.59,53.41 163.37,53.62 163.37,54.1 | J2.A7 163.54,54.4 163.38,54.24 163.38,54.11 163.37,54.1
DP
  Top 0.152: D1.6 157.58,54.56 158.5,54.56 159.11,55.17 163.33,55.17 163.59,54.91 164.14,54.91 J2.B6 164.88,54.91 165.08,54.72 165.08,54.06 164.93,53.91 164.17,53.91 J2.A6
EPD_3V3  (via drill 0.35)
  Top 0.152: 81.38,30.94 79.1,30.94 Q2.2 | 81.38,30.94 82.45,29.87 v82.45,29.26 82.45,28.35 C7.1 | 81.38,30.94 81.84,31.39 81.84,33.83 84.12,36.12 84.89,36.12 L1.2 | J1.16 84.43,15.24 84.73,15.24 J1.15 | J1.15 84.89,15.24 84.89,16.15 86.09,17.36 87.51,17.36 88,17.85 88,18.66 89.27,19.93 EPD_C5.2 89.15,19.96 v88.39,20.73 | TP17.TP 106.07,15.24 106.07,14.17 107.29,12.95 107.29,11.89 106.22,10.82 87.02,10.82 84.73,13.11 84.73,15.09 J1.15
  Bottom 0.152: v82.45,29.26 82.45,26.67 v88.39,20.73
EPD_3V3_C  (via drill 0.35)
  Top 0.152: v78.03,33.07 78.79,33.07 78.94,32.92 Q2.1 | v20.57,53.95 20.57,63.86 U2.18 | v98.3,14.33 100.13,12.5 TP13.TP
  Top 0.3: R_CL1.1 77.39,31.12 v78.03,30.48
  Bottom 0.152: v78.03,33.07 v78.03,30.48 | v20.57,53.95 21.03,53.95 41.91,33.07 v78.03,33.07 | v98.3,14.33 93.88,14.33 86.56,21.64 86.56,22.1 81.08,27.58 81.08,29.41 80.92,29.57 80.92,30.63 83.21,32.92 83.21,33.98 82.91,34.29 79.25,34.29 v78.03,33.07
EPD_BUSY  (via drill 0.35)
  Top 0.152: 98.75,16.61 94.03,11.89 90.68,11.89 87.94,14.63 87.94,15.09 J1.9 | 98.75,16.61 110.95,16.61 112.17,15.39 TP9.TP | v18.14,54.56 10.36,62.33 10.36,63.86 U2.26 | 98.75,16.61 98.75,35.66 94.79,39.62 v94.79,39.7
  Bottom 0.152: v18.14,54.56 20.88,54.56 23.47,51.97 80.83,51.97 82.75,53.88 82.75,53.9 84.17,55.32 84.73,55.32 89.61,50.44 89.61,44.88 v94.79,39.7
EPD_CS  (via drill 0.35)
  Top 0.152: v86.26,16.61 86.26,15.24 J1.12 | D6.2 79.4,28.19 79.86,27.74 v80.47,27.74 80.77,27.43 82.91,27.43 83.21,27.74 83.21,28.8 83.36,28.96 85.8,28.96 89.61,32.77 89.61,35.51 88.24,36.88 87.58,36.88 85.82,38.65 85.82,39.27 84.97,40.11 81.87,40.11 74.83,33.07 | 74.83,33.07 74.83,31.85 75.44,31.24 R9.1 | 74.83,33.07 v63.09,44.81 | U2.11 20.57,46.33 20.57,46.02 21.79,44.81 31.8,44.81 v31.83,44.83 | v107.9,12.5 112.17,12.5 TP10.TP
  Bottom 0.152: 86.26,16.76 86.26,21.95 v80.47,27.74 | v63.09,44.81 31.85,44.81 v31.83,44.83 | v107.9,12.5 95.86,12.5 95.56,12.8 91.14,12.8 88.7,15.24 88.7,16.46 88.39,16.76 86.26,16.76 | 86.26,16.76 v86.26,16.61
EPD_DC  (via drill 0.35)
  Top 0.152: v88.54,12.19 86.87,13.87 86.87,15.09 J1.11 | v95.25,12.19 98.3,15.24 100.13,15.24 TP11.TP | U2.5 12.95,46.33 12.95,45.57 13.87,44.65 13.87,43.91 v13.88,43.9
  Bottom 0.152: v95.25,12.19 v88.54,12.19 87.78,12.95 86.26,12.95 85.8,12.5 78.64,12.5 61.27,29.87 36.27,29.87 35.75,29.34 27.64,29.34 27.28,29.7 27.28,32.31 15.7,43.89 v13.89,43.89 v13.88,43.9
EPD_RST  (via drill 0.35)
  Top 0.152: TP12.TP 105.92,12.34 104.7,11.12 90.83,11.12 87.33,14.63 87.33,15.09 J1.10 87.33,15.24 87.33,15.54 87.17,15.7 v87.17,16.15 | v20.73,52.88 16.76,56.84 16.76,63.86 U2.21
  Bottom 0.152: v20.73,52.88 21.64,52.88 44.35,30.18 71.48,30.18 76.35,25.3 76.35,20.57 80.47,16.46 81.08,16.46 82.14,17.53 82.14,19.96 83.52,21.34 84.12,21.34 85.65,19.81 85.65,16.31 85.95,16 87.02,16 v87.17,16.15
FLASH_CS
  Top 0.152: U1.1 30.48,58.37 32.31,56.54 32.31,47.7 32.46,47.55 D9.2 32.46,47.4 31.24,46.18 30.48,46.18 R5.1 30.33,46.02 29.41,45.11 22.71,45.11 21.79,46.02 21.79,46.33 U2.12
GDR
  Top 0.152: 75.59,13.41 75.59,11.58 76.05,11.12 R4.2 | 75.59,13.41 75.59,19.66 75.89,19.96 76.96,19.96 78.33,21.34 91.9,21.34 93.42,19.81 93.42,17.83 91.44,15.85 91.44,15.24 J1.2 | 75.59,13.41 72.54,13.41 71.78,12.65 Q3.1
GND  (via drill 0.3, 0.35)
  Top 0.15: v34,53.5 34,47.5 34.04,47.46 | v58.5,56.5 59,56.5 59.05,56.54
  Top 0.152: C10.2 68.12,107.9 68.73,107.29 68.73,106.22 68.58,106.07 67.36,106.07 65.84,107.59 CHANGE_BUTTON.2 65.68,107.75 62.33,107.75 CHANGE_BUTTON.1 62.18,107.59 60.5,105.92 55.78,105.92 53.8,107.9 C5.2 53.65,107.9 51.05,107.9 50.9,107.75 RESET_BUTTON.2 | 50.75,103.94 51.05,103.94 52.43,102.56 C_DELAY.2 | 50.75,103.94 49.84,103.94 49.68,103.78 49.68,103.33 48.16,101.8 48.01,101.8 47.7,101.5 IC1.3 | 50.75,103.94 50.75,107.59 RESET_BUTTON.2 | D10.1 35.36,33.07 31.09,33.07 D11.1 30.94,32.92 30.94,32.16 30.33,31.55 28.8,31.55 27.43,32.92 26.82,32.92 D12.1 26.71,33.07 23.85,33.07 13.42,43.51 13.34,43.51 12.5,44.35 | 12.5,44.35 9.6,44.35 7.92,46.02 7.92,46.33 U2.1 | 12.5,52.43 13.41,52.43 U2.29_4 13.56,52.43 14.63,52.43 U2.29_7 14.78,52.43 14.78,53.65 U2.29_8 | 12.5,52.43 12.34,52.43 U2.29_1 12.5,52.43 | U2.29_8 14.78,53.8 14.78,54.86 U2.29_9 | 13.56,53.8 13.56,54.86 U2.29_6 | 13.56,53.8 14.63,53.8 U2.29_8 | 13.56,53.8 U2.29_5 13.41,53.8 12.34,53.8 U2.29_2 12.19,53.8 12.19,54.86 U2.29_3 12.19,55.02 7.92,59.28 7.92,63.86 U2.28 7.77,64.01 7.77,82.45 | J4.P6 5.64,92.81 5.33,92.81 3.05,95.1 3.05,95.56 J4.G4 3.05,95.71 7.77,100.43 8.53,100.43 C9.2 8.69,100.43 9.91,100.43 10.52,99.82 12.65,99.82 12.8,99.67 D8.1 12.95,99.67 13.72,100.43 14.94,100.43 | 7.77,82.45 13.26,82.45 16.15,85.34 J4.G1 16.15,85.5 16.15,86.41 15.39,87.17 15.39,90.22 16.15,90.98 J4.G2 16.15,91.14 15.39,91.9 15.39,99.97 14.94,100.43 | 7.77,82.45 2.13,82.45 J4.G3 | v12.5,45.11 12.5,44.35 | 12.5,52.43 v12.5,51.36 | v21.03,106.53 22.25,107.75 BOOT_BUTTON.1 22.4,107.9 25.76,107.9 BOOT_BUTTON.2 25.91,107.75 28.5,107.75 C6.2 28.65,107.75 42.52,107.75 43.43,108.66 46.33,108.66 47.24,107.75 RESET_BUTTON.1 48.3,107.75 48.36,107.68 48.87,107.68 48.93,107.75 RESET_BUTTON.2
  Top 0.152: 14.94,100.43 v15.24,100.74 | 155.3,4.72 155.91,4.72 C1.2 | 155.3,4.72 154.69,4.72 C2.2 | 155.3,4.72 155.3,7.01 SENSOR2.5 155.14,7.01 154.38,7.77 154.38,8.23 154.84,8.69 | 154.84,8.69 155.14,8.69 SENSOR2.7 154.84,8.69 | 154.84,8.69 154.38,9.14 154.38,9.75 154.69,10.06 155.91,10.06 156.36,9.6 158.04,9.6 SENSOR2.1 158.19,9.6 164.59,16 164.59,17.79 J3.1 164.72,17.83 165.2,17.83 165.96,18.59 165.96,49.17 165.67,49.15 J2.MP3 | 156.89,49 156.97,48.92 159.11,48.92 | 156.89,49 155.94,49.95 R2_USB1.1 | 161.39,51.21 161.39,52.58 160.02,53.95 160.02,54.25 C5_USB.2 | 161.39,51.21 161.7,50.9 164.05,50.9 | J2.A1 164.05,50.9 | J2.B12 164.16,50.87 164.12,50.9 164.05,50.9 | 161.39,51.21 159.11,48.92 | 156.89,49 R2_USB.2 | 164.28,50.77 164.27,50.78 164.29,50.88 164.21,50.8 J2.A1 | 164.28,50.77 164.76,50.29 | J2.MP3 164.74,49.04 164.74,50.29 164.76,50.29 | J2.A1 164.14,50.9 164.28,50.75 164.28,50.77 | C4_USB.2 153.01,54.25 153.92,54.25 154.53,53.65 154.99,53.65 D1.2 155.14,53.65 155.6,53.65 156.67,54.71 156.67,54.86 159.01,57.21 164.15,57.21 J2.B1 164.21,57.25 164.21,57.62 164.24,57.62 164.24,57.64 | 164.76,50.29 165.12,50.29 166.08,51.25 166.08,57.24 165.44,57.88 164.41,57.88 164.24,57.71 164.24,57.64 | 164.14,57.61 164.14,58.68 J2.MP4 165.36,59.17 168.14,59.17 168.17,59.14 168.54,59.14 J2.MP2 | 164.24,57.64 164.26,57.64 164.29,57.61 164.14,57.61 | 164.14,57.61 J2.A12 | C1_BAT2.2 115.06,32.16 115.06,36.12 119.18,40.23 R2_BAT.1 | 117.96,42.67 117.96,41.6 119.18,40.39 R2_BAT.1 | 117.96,42.67 117.96,43.43 C1_BAT.2 | IC4.2 119.79,33.68 119.18,33.07 119.18,32.46 117.5,30.79 R1_PWRUSB.1 117.5,30.63 117.5,30.18 119.63,28.04 120.55,28.04 C1_BAT1.2 121.46,28.96 124.66,32.16 125.5,32.16 C3.- 126.32,32.31 128.47,32.31 130.3,34.14 131.06,34.14 132.13,35.2 132.13,40.54 131.22,41.45 126.19,41.45 124.21,43.43
  Top 0.152: 129.69,46.63 129.08,46.02 128.78,46.02 U4.4 | 129.39,47.24 129.54,47.09 129.54,46.79 U4.9 | 129.39,47.24 129.24,47.4 128.78,47.4 U4.1 128.63,47.4 126.8,47.4 C2_BAT.2 126.64,47.4 123.6,47.4 122.07,45.87 | 129.69,46.63 130.61,46.63 U4.6 | 129.69,46.63 U4.9 | 122.07,45.87 121.92,45.72 121.92,45.11 122.53,44.5 122.83,44.5 MPC73831.2 122.99,44.35 123.29,44.35 124.21,43.43 | 122.07,45.87 120.24,47.7 120.24,48.92 121.2,49.88 121.2,51.71 TP4.TP | 129.39,47.24 133.35,51.21 134.57,51.21 TP5.TP 134.72,51.21 142.4,43.53 159.74,43.53 160.02,43.82 160.02,47.7 159.11,48.62 159.11,48.92 | 129.39,47.24 U4.9 | 124.21,43.43 121.16,40.39 119.33,40.39 R2_BAT.1 | EPD_C6.1 86.56,18.59 85.65,18.59 EPD_C7.1 85.5,18.59 84.28,18.59 EPD_C8.1 84.12,18.59 82.91,18.59 EPD_C9.1 82.75,18.44 v82.75,17.68 | J1.17 83.82,14.63 81.99,12.8 79.4,12.8 J1.MP2 | 75.44,10.36 74.83,10.97 R4.1 | 75.44,10.36 76.96,10.36 79.25,12.65 J1.MP2 | v78.03,15.09 76.96,16.15 EPD_C12.1 | v79.25,13.87 79.25,12.8 J1.MP2 | v76.96,18.59 81.38,18.59 EPD_C10.1 | EPD_C1.1 92.05,18.59 90.83,18.59 EPD_C2.1 90.68,18.75 89.31,18.75 EPD_C5.1 89.15,18.59 89.15,16.46 88.39,15.7 88.39,15.24 J1.8 88.39,15.09 88.39,14.63 90.22,12.8 92.81,12.8 J1.MP1 92.96,12.8 92.96,16.92 93.73,17.68 93.73,19.96 85.5,28.19 | 79.1,27.13 83.06,27.13 83.82,27.89 83.82,28.19 C7.2 83.97,28.19 85.5,28.19 | 79.1,27.13 78.03,28.19 D6.1 | 79.1,27.13 79.1,24.08 73.91,18.9 73.91,16.92 74.52,16.31 EPD_C11.1 74.52,16.15 74.52,15.7 72.54,13.72 71.63,13.72 70.87,12.95 70.87,10.82 R2.1 70.71,10.67 70.71,8.53 SJ1.1 70.87,8.38 70.87,8.08 71.78,7.16 74.68,7.16 75.44,7.92 75.44,10.36
  Top 0.152: U1.4 30.33,54.71 30.33,55.02 29.72,55.63 v29.41,55.32 29.41,56.19 U1.2 | 34.04,47.46 32.61,46.02 D9.1 | C8.2 89.31,43.74 89.31,39.47 88.85,39.01 D3.1 88.85,38.86 89.92,37.8 89.92,32.61 85.5,28.19 | 99.36,47.7 99.36,49.23 99.06,49.53 97.54,49.53 96.62,48.62 96.16,48.62 C10_SUPERCAP.1 | 99.36,47.7 95.56,43.89 89.46,43.89 C8.2 | C8.2 89.31,43.89 86.41,46.79 86.41,47.4 U3.13 86.26,47.55 86.26,47.85 85.34,48.77 66.83,48.77 59.05,56.54 | 117.96,42.67 104.39,42.67 99.36,47.7 | J2.MP3 J2.MP1
  Bottom 0.15: 34,53 v34,53.5 | 34,53 24.5,53 24,53.5 23.5,53 23,53 21,55 18.5,55 18,55.5 16.5,55.5 12.5,51.5 v12.5,51.36 | 34,53 81,53 81.5,53.5 81,54 81,54.5 78,57.5 37.5,57.5 37.5,56.5 v58.5,56.5
  Bottom 0.152: v12.5,45.11 v12.5,51.36 13.11,51.36 17.07,55.32 v29.41,55.32 | v15.24,100.74 v21.03,106.53 | v76.96,18.59 76.96,16.15 v78.03,15.09 v79.25,13.87 80.31,12.8 85.65,12.8 85.95,13.11 85.95,13.72 85.65,14.02 83.67,14.02 81.69,16 81.69,16.61 v82.75,17.68
  pour Bottom: 76.96,10.06 76.98,10.08 95.22,10.08 95.24,10.06 95.26,10.04 95.28,10.02 95.28,0.08 170.12,0.08 170.12,67.12 92.18,67.12 92.16,67.14 92.14,67.16 92.12,67.18 92.12,111.12 68.22,111.12 68.22,110.01 68.2,109.99 68.18,109.97 68.16,109.95 20.26,109.95 20.24,109.97 20.22,109.99 20.2,110.01 20.2,111.92 0.08,111.92 0.08,64.38 6.41,64.38 6.43,64.36 6.45,64.34 6.47,64.32 6.47,46.08 6.45,46.06 6.43,46.04 6.41,46.02 0.08,46.02 0.08,0.08 76.92,0.08 76.92,10.02 76.94,10.04
GPIO8
  Top 0.152: R1.1 19.27,42 18.44,42.82 18.44,45.26 19.2,46.02 19.2,46.33 U2.10
INT_RTC  (via drill 0.35)
  Top 0.152: U3.3 87.48,56.84 87.48,57.3 86.56,58.22 86.56,58.98 R1_PINH1.1 86.41,59.13 85.5,59.13 83.82,60.81 TP15.TP 83.67,60.81 v81.38,58.52 | v27.28,58.52 16.76,48.01 16.76,46.48 U2.8
  Bottom 0.152: v81.38,58.52 v27.28,58.52
IO/BOOT
  Top 0.152: 19.66,106.83 22.25,109.42 BOOT_BUTTON.4 22.4,109.27 25.76,109.27 BOOT_BUTTON.3 | 19.66,106.83 19.36,106.53 R_BOOT.1 | 19.66,106.83 20.57,105.92 21.34,105.92 21.79,106.38 28.5,106.38 C6.1 28.65,106.38 37.64,97.38 37.64,86.87 24.38,73.61 24.38,64.01 U2.15
IO/CHANGE  (via drill 0.35)
  Top 0.152: C10.1 67.97,106.68 66.75,107.9 66.75,108.36 65.84,109.27 CHANGE_BUTTON.3 65.68,109.27 62.33,109.27 CHANGE_BUTTON.4 62.18,109.27 61.27,108.36 61.27,108.05 59.89,106.68 R_CHANGE.1 59.74,106.53 v56.39,106.53 | v37.03,87.17 14.17,64.31 14.17,64.01 U2.23
  Bottom 0.152: v56.39,106.53 v37.03,87.17
MISO  (via drill 0.3, 0.35)
  Top 0.15: v39,34.5 39,56.5 34.5,56.5 U1.9
  Top 0.152: v27.89,33.38 26.82,34.44 D12.2 | R8.1 26.98,29.26 27.67,29.95 v27.89,29.95 | v7.01,92.96 6.25,93.73 5.94,93.73 J4.P7 | v12.34,80.47 14.94,77.88 TP6.TP 14.94,77.72 9.14,71.93 9.14,64.01 U2.27 9.14,63.86 9.14,61.72 16.31,54.56 v17.22,54.56
  Bottom 0.15: v39,34.5 38,33.5 28,33.5 v27.89,33.38
  Bottom 0.152: v7.01,92.96 7.01,85.8 v12.34,80.47 | v17.22,54.56 v26.06,45.72 26.06,35.2 v27.89,33.38 v27.89,29.95
MOSI  (via drill 0.35)
  Top 0.152: v7.62,89.46 5.94,89.46 J4.P3 | v11.89,81.84 11.89,80.92 10.06,79.1 10.06,77.88 TP7.TP | 30.02,34.59 28.04,34.59 21.34,41.3 18.59,41.3 15.54,44.35 15.54,46.33 U2.7 15.39,46.48 15.39,47.4 9.75,53.03 v9.75,53.49 | 30.02,34.59 30.94,34.59 D11.2 | v85.34,13.41 85.34,15.09 J1.14 | 38.25,28.65 31.7,28.65 31.24,29.11 R7.1 31.09,29.26 30.4,29.95 v30.02,29.95 | 38.25,28.65 v72.08,28.65 | 38.25,28.65 38.25,54.56 U1.5 | 30.02,34.59 v30.02,32.16
  Bottom 0.152: v7.62,89.46 7.62,86.11 v11.89,81.84 12.95,80.77 12.95,69.04 9.75,65.84 v9.75,53.49 | v85.34,13.41 83.06,13.41 74.22,22.25 74.22,26.52 v72.08,28.65 | v30.02,29.95 v30.02,32.16
N$1  (via drill 0.35)
  Top 0.152: v159.72,50.44 156.99,50.44 R2_USB1.2 | v162.15,52.88 163.52,52.88 163.54,52.91 164.15,52.91 J2.A5
  Bottom 0.152: v162.15,52.88 v159.72,50.44
N$2
  Top 0.152: 93.57,36.27 95.4,36.27 C4.1 | 93.57,36.27 92.35,35.05 D4.1 | 93.57,36.27 92.35,37.49 92.35,38.86 D3.2
N$3
  Top 0.152: C_DELAY.1 52.43,101.19 50.29,103.33 IC1.5
N$4
  Top 0.152: CHG_LED.C 116.28,45.26 114.91,45.26 114.3,44.65 113.23,44.65 112.62,45.26 R1_BAT.1
N$5
  Top 0.152: R1_BAT.2 113.84,45.41 114.61,45.41 115.21,46.02 120.85,46.02 121.61,45.26 121.61,44.35 122.38,43.59 122.83,43.59 MPC73831.1
N$7  (via drill 0.35)
  Top 0.152: v154.76,49.84 155.47,49.12 R2_USB.1 | v160.78,55.93 163.57,55.93 163.59,55.91 164.14,55.91 J2.B5
  Bottom 0.152: v160.78,55.93 154.76,49.91 v154.76,49.84
N$8
  Top 0.152: R2_BAT.2 119.33,41.76 119.33,42.52 120.24,43.43 MPC73831.5
N$14
  Top 0.152: J1.5 89.92,15.24 89.92,15.7 92.2,17.98 92.66,17.98 92.81,18.14 92.81,19.05 92.66,19.2 91.44,19.2 90.83,19.81 EPD_C2.2
N$24
  Top 0.152: J1.4 90.37,15.24 90.37,15.7 92.35,17.68 92.81,17.68 93.12,17.98 93.12,19.2 92.51,19.81 92.2,19.81 EPD_C1.2
N$25
  Top 0.152: J1.24 80.31,15.24 80.01,15.24 77.72,17.53 76.96,17.53 EPD_C12.2
N$27
  Top 0.152: J1.22 81.38,15.24 81.38,17.37 82.14,18.14 82.14,19.2 81.53,19.81 EPD_C10.2
N$29  (via drill 0.35)
  Top 0.152: v82.3,16.31 82.3,15.24 J1.20 | v83.82,20.73 83.82,20.27 84.12,19.96 EPD_C8.2
  Bottom 0.152: v82.3,16.31 83.82,17.83 v83.82,20.73
N$30
  Top 0.152: J1.19 82.91,15.24 82.91,15.7 85.18,17.97 87.25,17.97 87.39,18.11 87.39,19 87.25,19.13 86.18,19.13 85.5,19.81 EPD_C7.2
N$31
  Top 0.152: J1.18 83.44,15.27 83.44,15.64 85.46,17.67 87.38,17.67 87.69,17.98 87.69,19.12 87.38,19.43 87.13,19.43 EPD_C6.2
N$39
  Top 0.152: D7.1 89.92,59.28 89.92,58.22 89.46,57.76 89.46,51.21 92.81,47.85 R_CAPACITOR.1
N$42
  Top 0.152: D2.2 130.3,32.61 129.24,32.61 124.36,27.74 119.33,27.74 116.74,30.33 116.74,31.39 117.35,32 R1_PWRUSB.2 117.5,32.07 117.5,33.29 124.14,39.93 129.39,39.93 Q1.1
N$43
  Top 0.152: 120.7,33.83 120.7,33.98 119.94,34.75 IC4.1 | 120.7,33.83 120.7,33.38 120.4,33.07 120.24,33.07 119.94,32.77 IC4.3 119.94,32.61 119.94,28.96 C1_BAT1.1 | Q1.2 131.37,39.93 130.45,39.01 130.45,34.9 D2.1 130.3,34.75 129.39,33.83 120.7,33.83
PREVGH  (via drill 0.35)
  Top 0.152: 76.5,19.05 78.03,20.57 82.14,20.57 82.75,19.96 EPD_C9.2 | 76.5,19.05 76.2,18.75 76.2,15.85 77.57,14.48 81.53,14.48 81.84,14.78 81.84,15.09 J1.21 | 76.5,19.05 v76.2,19.36 | D5.1 83.21,38.86 82.43,38.86 76.43,32.87 76.43,29.04 v73.61,26.21
  Bottom 0.152: v73.61,26.21 73.61,21.95 v76.2,19.36
PREVGL  (via drill 0.35)
  Top 0.152: v80.77,17.07 80.77,15.24 J1.23 | v76.96,20.88 76.35,20.88 74.68,19.2 74.68,17.68 EPD_C11.2 | v82.6,33.68 87.02,33.68 88.24,34.9 88.7,34.9 D4.2
  Bottom 0.152: v80.77,17.07 v76.96,20.88 76.96,27.13 82.6,32.77 v82.6,33.68
RESE  (via drill 0.35)
  Top 0.152: v92.05,13.41 90.83,14.63 90.83,15.09 J1.3 | 74.68,9.75 74.07,9.14 R3.2 | 74.68,9.75 73,11.43 73,12.5 Q3.2 | 74.68,9.75 v74.83,9.91
  Bottom 0.152: v92.05,13.41 107.9,13.41 108.51,12.8 108.51,12.19 106.59,10.28 75.2,10.28 v74.83,9.91
RESE'
  Top 0.152: R3.1 73.91,7.77 73,7.77 72.39,8.38 SJ1.2 72.24,8.53 72.08,8.69 72.08,10.67 R2.2
RESET  (via drill 0.35)
  Top 0.152: 48.62,109.27 50.75,109.27 RESET_BUTTON.3 | 48.62,109.27 47.4,109.27 RESET_BUTTON.4 | R_RESET.1 44.04,106.53 44.04,103.94 v45.41,102.56 47.4,100.58 53.03,100.58 53.65,101.19 53.65,106.53 C5.1 | v10.36,50.6 10.36,46.48 U2.3 | v48.62,108.28 48.62,109.27 | IC1.1 46.98,103.38 v46.5,103.86
  Bottom 0.152: v10.36,50.6 10.36,65.99 45.41,101.04 v45.41,102.56 46.5,103.65 v46.5,103.86 48.62,105.98 v48.62,108.28
RTC_RST
  Top 0.152: U2.16 23.16,63.86 23.16,63.4 25.45,61.11 35.51,61.11 37.19,59.44 37.19,58.56 37.7,58.05 78.2,58.05 80.92,55.32 85.34,55.32 86.26,56.24 86.26,56.69 U3.4
RX
  Top 0.152: U2.24 12.95,64.01 12.95,66.29 13.56,66.9 TP2.TP
SCK  (via drill 0.3, 0.35)
  Top 0.15: 35.69,53.22 36.73,52.18 36.73,35.43 36.91,35.43 | 36.91,35.43 v37.19,35.43 | 36.91,35.43 36.91,32.57 36.64,32.3 | v35.82,35.46 35.82,35.41 35.59,35.18 35.59,34.64 35.52,34.57 D10.2
  Top 0.152: 35.69,53.22 38.1,55.63 38.1,55.93 U1.6 | v4.57,79.4 4.57,78.18 4.88,77.88 TP8.TP | v86.56,12.34 86.56,13.11 85.8,13.87 85.8,15.09 J1.13 | R6.1 35.66,29.26 v36.58,29.26 36.58,32.24 36.64,32.3 | v24.99,33.68 14.17,44.5 14.17,46.33 U2.6 | J4.P5 5.51,91.96 v4.56,91.96
  Bottom 0.15: v37.19,35.43 35.9,35.43 35.87,35.46 v35.82,35.46
  Bottom 0.152: v86.56,12.34 86.11,12.34 85.95,12.19 53.65,12.19 v36.58,29.26 36.27,28.96 27.43,28.96 24.99,31.39 v24.99,33.68 23.01,33.68 9.14,47.55 9.14,62.1 4.57,66.67 v4.57,79.4 4.57,91.95 v4.56,91.96
SCL  (via drill 0.35)
  Top 0.152: 158.95,6.4 158.19,7.16 SENSOR2.4 | 158.95,6.4 159.41,5.94 159.41,4.27 158.65,3.5 R2_PINH.1 | 132.74,47.85 133.5,48.62 133.5,48.92 134.11,49.53 135.18,49.53 163.68,21.03 | 132.74,47.85 131.98,47.09 130.76,47.09 U4.7 | 163.68,21.03 163.98,20.73 164.47,20.73 J3.4 | v159.11,6.55 158.95,6.4 | v18.75,62.64 17.98,63.4 17.98,63.86 U2.20 | v90.22,49.07 90.22,47.55 U3.16 | v132.74,47.7 132.74,47.85 | 163.68,21.03 159.18,16.53 v159.11,16.53
  Bottom 0.152: v18.75,62.64 19.51,62.64 19.66,62.79 87.48,62.79 91.9,58.37 91.9,50.75 | v90.22,49.07 91.9,50.75 | v132.74,47.7 129.69,50.75 91.9,50.75 | v159.11,16.53 v159.11,6.55
SDA  (via drill 0.35)
  Top 0.152: 158.65,7.92 159.72,6.86 159.72,3.35 159.11,2.74 158.19,2.74 157.58,3.35 157.28,3.35 R1_PINH.1 | 158.65,7.92 158.19,7.92 SENSOR2.3 158.65,7.92 | 131.67,47.55 130.76,47.55 U4.8 | 131.67,47.55 133.96,49.84 135.64,49.84 164.13,21.34 165.51,21.34 165.66,21.18 165.66,20.27 165.2,19.81 164.72,19.81 J3.3 164.4,19.48 v163.37,19.48 | v163.37,12.65 158.65,7.92 | v19.96,62.18 19.36,62.79 19.36,63.86 U2.19 | v131.67,47.7 131.67,47.55 | v91.14,46.79 90.37,46.02 89.76,46.02 88.85,46.94 88.85,47.4 U3.15 88.7,47.55 88.7,48.01 82.44,54.26 v81.84,54.26
  Bottom 0.152: v19.96,62.18 22.71,62.18 26.98,57.91 78.19,57.91 v81.84,54.26 | v131.67,47.7 92.05,47.7 v91.14,46.79 | v163.37,19.48 v163.37,12.65
SRC  (via drill 0.35)
  Top 0.152: v87.63,38.1 86.87,38.86 D5.2 | v81.53,29.87 78.18,29.87 72.39,24.08 72.39,14.78 Q3.3 | L1.1 84.92,32.16 v84.3,32.78 | C4.2 95.12,38.08 v95.07,38.08
  Bottom 0.152: v81.53,29.87 81.53,30.79 83.53,32.78 | 83.53,32.78 87.63,36.88 v87.63,38.1 95.05,38.1 v95.07,38.08 | 83.53,32.78 v84.3,32.78
SS_SD
  Top 0.152: D8.2 14.33,99.52 13.56,98.75 12.34,98.75 12.04,99.06 11.12,99.06 R10.1 10.97,99.06 10.97,91.9 7.47,88.39 6.4,88.39 J4.P2 6.25,88.24 5.33,88.24 0.76,83.67 0.76,80.16 6.67,74.26 6.67,55.66 11.58,50.75 11.58,46.48 U2.4
TX
  Top 0.152: U2.25 11.58,64.01 11.58,66.14 10.97,66.75 TP1.TP
USB_D+  (via drill 0.35)
  Top 0.152: v30.02,60.5 27.89,58.37 27.89,49.99 24.38,46.48 U2.14 | D1.1 154.99,54.56 153.77,54.56 147.81,60.52 89.32,60.52 89.3,60.5 v85.19,60.5
  Bottom 0.152: v30.02,60.5 v85.19,60.5
USB_D-  (via drill 0.35)
  Top 0.152: v90.98,57.76 92.2,56.54 96.47,56.54 99.36,53.65 153.47,53.65 154.53,52.58 154.99,52.58 D1.3 | v30.02,59.59 28.19,57.76 28.19,48.77 24.84,45.41 23.77,45.41 23.16,46.02 23.16,46.33 U2.13
  Bottom 0.152: v90.98,57.76 83.06,57.76 80.92,59.89 30.33,59.89 v30.02,59.59
VBAT
  Top 0.152: U4.2 128.63,46.94 128.63,46.63 U4.3 128.63,46.48 128.32,46.48 127.25,45.41 | 126.64,46.02 127.25,45.41 | 127.25,45.41 129.54,43.13 | 129.54,43.13 130.45,42.22 Q1.3 | 126.64,46.02 126.03,45.41 122.99,45.41 MPC73831.3 | 126.64,46.02 C2_BAT.1 | 129.54,43.13 134.57,48.16 TP3.TP
VBUS
  Top 0.152: 153.33,52.88 153.01,52.88 C4_USB.1 152.86,52.88 152.39,52.88 | 157.21,53.42 157.43,53.65 D1.5 | 159.26,52.88 159.4,52.88 | 158.11,45.8 158.65,45.8 PFMF.050.1.2 | 154.08,49.23 154.08,49.07 | 118.29,45.41 117.96,45.41 CHG_LED.A 117.81,45.26 | 116.73,44.18 116.59,44.04 | 116.59,43.59 C1_BAT.1 | 121.61,50.14 121.61,50 | 121.61,48.64 121.61,48.46 TP14.TP | 122.68,52.27 122.68,52.14 | 122.68,52.27 122.55,52.41 | 121.92,53.03 121.74,53.03 | 118.87,53.03 118.73,52.9 | 112.62,44.04 112.8,44.04 | 122.74,52.34 122.68,52.27
  Top 0.3: 158.11,45.8 157.35,45.8 154.08,49.07 | 154.08,49.23 154.08,52.27 153.47,52.88 153.33,52.88 | 156.85,51.96 156.54,52.27 156.54,52.7 156.68,52.83 156.68,52.98 157.12,53.42 157.21,53.42 | 156.85,51.96 158.33,51.96 159.26,52.88 | C5_USB.1 159.79,52.88 159.4,52.88 | 152.39,52.88 123.29,52.88 122.74,52.34 | 122.68,52.14 122.68,51.21 121.61,50.14 | 121.61,50 121.61,48.64 | 122.55,52.41 121.92,53.03 | 112.8,44.04 116.59,44.04 116.59,43.59 | 116.73,44.18 117.81,45.26 | 118.29,45.41 120.22,45.41 MPC73831.4 | 121.74,53.03 121.68,53.09 118.93,53.09 118.87,53.03 | 118.73,52.9 117.57,52.9 110.31,45.64 111.91,44.04 112.62,44.04 | C4_USB.1 153.36,52.99 154.39,51.96 156.85,51.96
VRTC
  Top 0.152: U3.14 87.63,47.4 87.63,46.79 89.31,45.11 C8.1 89.46,45.11 91.29,45.11 94.49,48.31 | 94.49,48.31 95.25,47.55 97.38,47.55 98.3,48.46 C10_SUPERCAP.2 | 94.49,48.31 93.73,49.07 92.81,49.07 R_CAPACITOR.2
VUSB  (via drill 0.35)
  Top 0.152: 154.73,45.63 154.53,45.63 PFMF.050.1.1 | 156.09,45.63 156.39,45.63 v156.45,45.57
  Top 0.3: 154.73,45.63 156.09,45.63 | J2.A9 J2.B4 164.78,56.4 165.43,55.75 165.43,52.53 164.74,51.84 164.22,51.84 J2.B9 164.31,51.75 J2.A4 164.15,51.61 163.77,51.61 163.69,51.53 162.02,51.53 v162,51.51
  Bottom 0.152: v162,51.51 161.71,51.22
  Bottom 0.3: 161.71,51.22 161.71,50.83 v156.45,45.57